# Altium PCB tomg.PcbDoc (part 1 of 2)
Units mm, origin at the board's own origin, x right, y up, seen from the top; angles counter-clockwise.
Board outline 105.3 x 86.65 mm, 2 copper layers (Top Layer, Bottom Layer); 102 components, 0 nets, 379 pads, 0 vias.
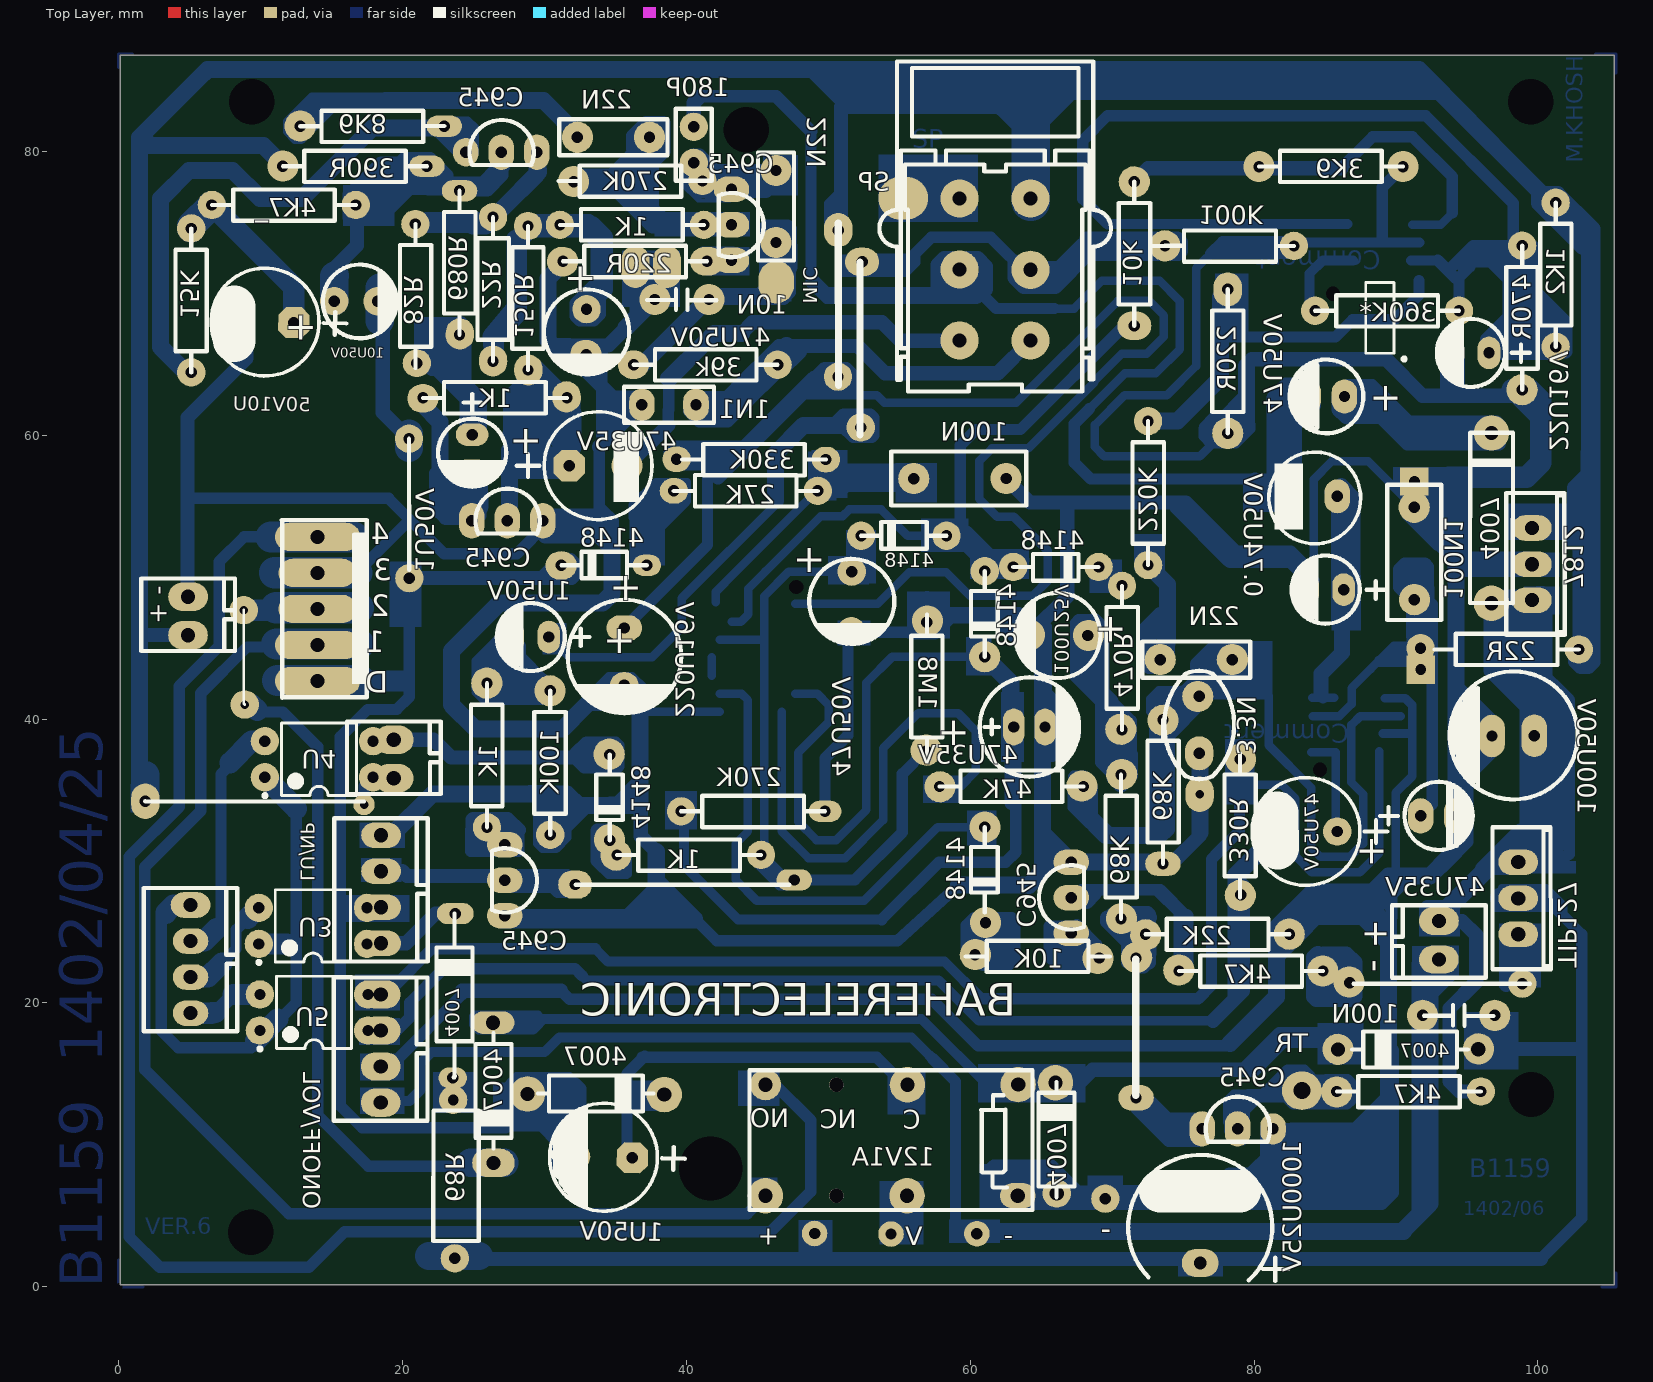
[diagram p0: Top Layer view]
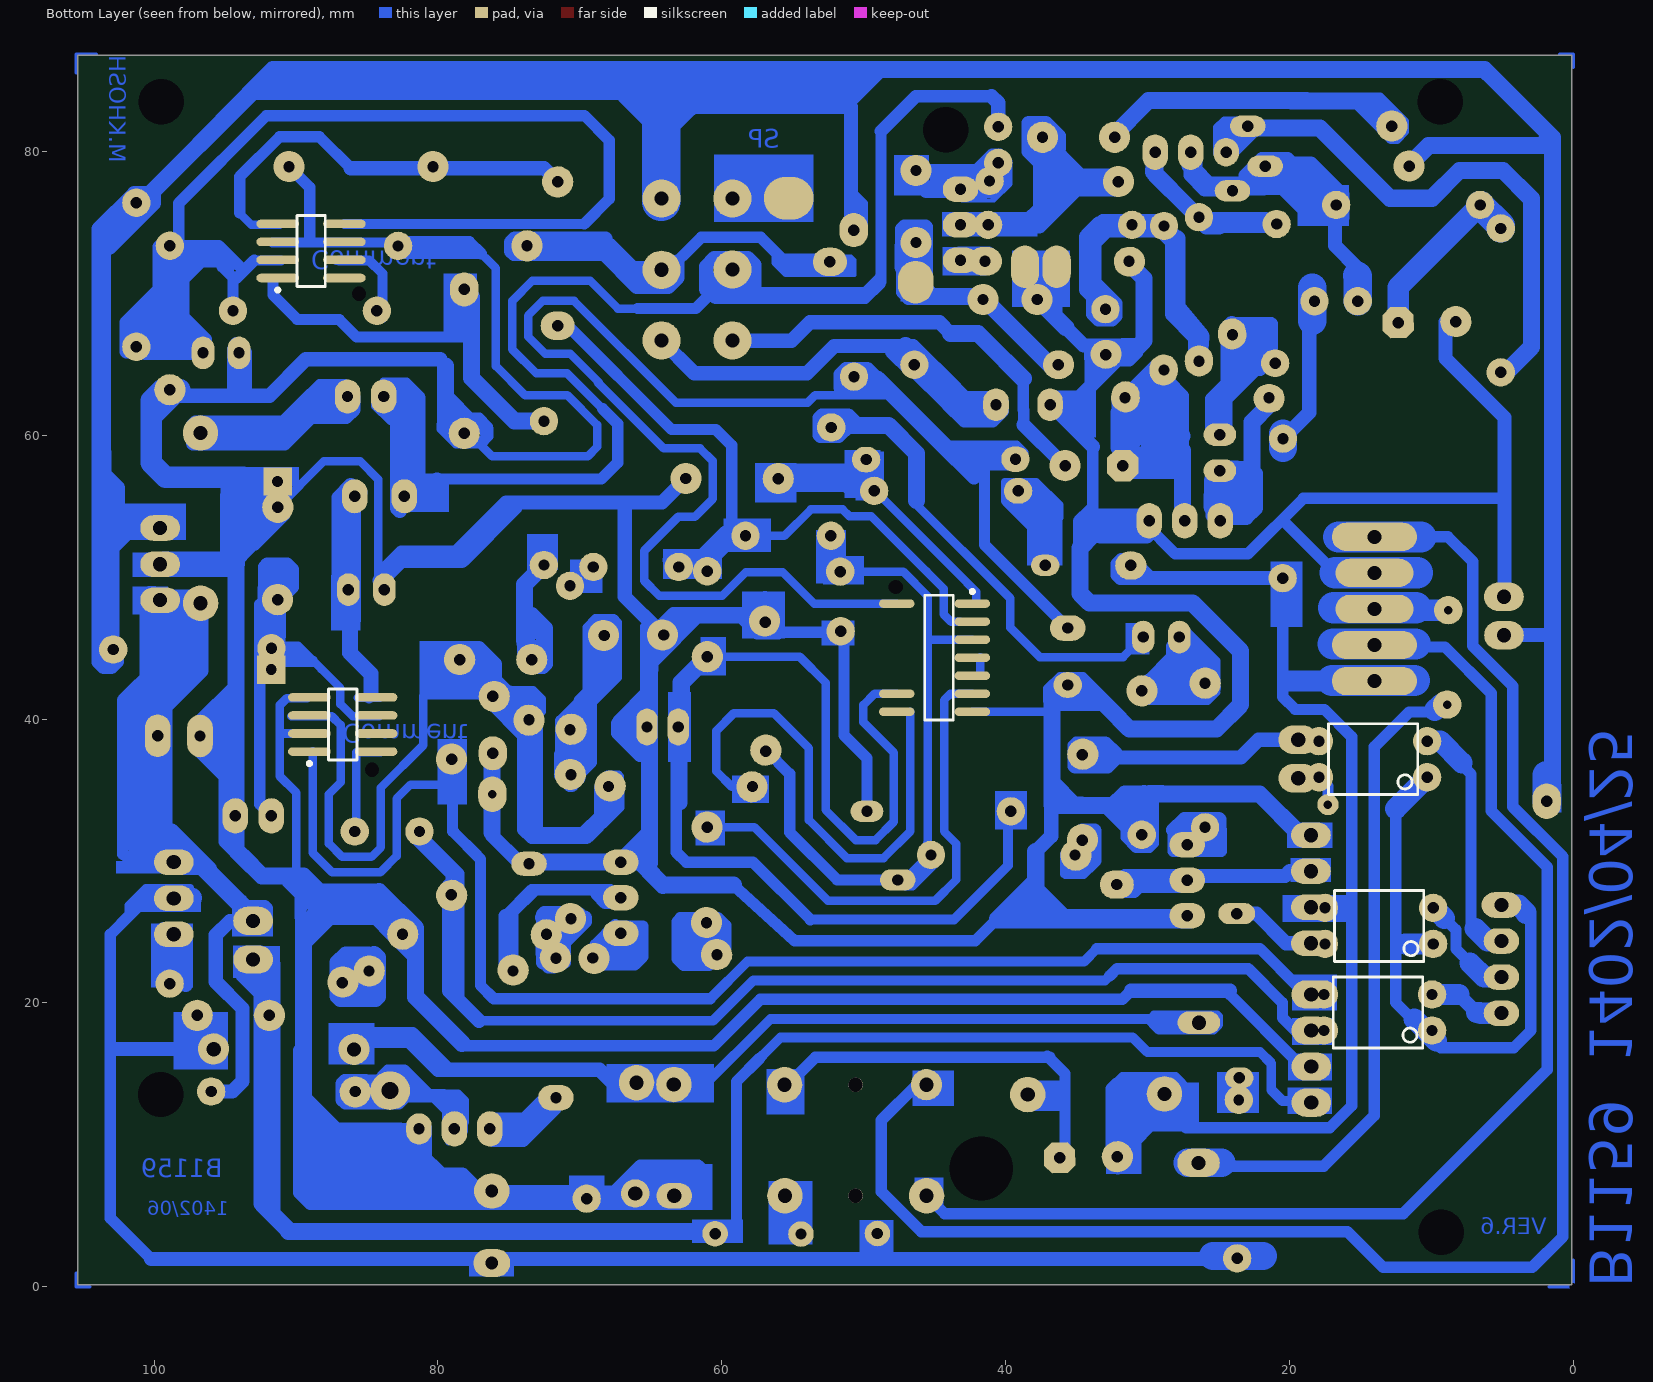
[diagram p1: Bottom Layer view, seen from below]

## Layer stack, top to bottom
Top Solder: solder mask 0.0102, Solder Resist, Dk 3.5
Top Layer: signal copper 0.0356
Dielectric1: dielectric 0.32, FR-4, Dk 4.8
Bottom Layer: signal copper 0.0356
Bottom Solder: solder mask 0.0102, Solder Resist, Dk 3.5

## Board outline
0.097,0.125 105.394,0.125 105.394,86.774 0.097,86.774

## Design rules (kind name [scope] priority, off if disabled: settings)
Clearance [All] p1: gap=0.3 ignorepadtopadclearanceinfootprint=FALSE except(0: Arc-Hole Track-Hole SMDPad-Hole THPad-Hole Via-Hole Fill-Hole Poly-Hole Region-Hole Text-Hole)
FabricationTestPointUsage TestPointUsage [All] p1: valid=0 allowmultiple=FALSE
FabricationTestpoint Testpoint [(IsPad And (OnTopLayer Or OnBottomLayer))] p1: side=3 testpointundercomponent=TRUE minsize=1.016 maxsize=2.54 preferedsize=1.524 minholesize=0 maxholesize=1.016 preferedholesize=0.813 testpointgrid=0.025 allowsidetop=TRUE allowsidebottom=TRUE usegrid=TRUE gridtolerance=0
PolygonConnect [All] p1: connectstyle=Relief reliefconductorwidth=0.254 reliefentries=4 polygonreliefangle="90 Angle" airgapwidth=0.254
RoutingVias [All] p1: holewidth=0.8 width=1.6 viastyle="Through Hole" minholewidth=0.711 minwidth=1.27 maxholewidth=0.711 maxwidth=1.27
SolderMaskExpansion [All] p1: expansion=0.102
Width [All] p1: maxlimit=0.3 minlimit=0.3 preferedwidth=0.3
28 further rules are at their usual default settings.

## Components (designator, comment, footprint, x,y, rotation, side; value= is the part's Value field where it differs from the comment)
0.74U50V "0.47uF" RB.1/.3#1 86.312,49.12 r0 top
1K "1K" AXIAL0.4#1 31.575,62.633 r180 top
1K "1K" AXIAL0.4#2 41.227,74.825 r180 top
1K "1K" AXIAL0.4#2 35.106,30.426 r0 top
1K "1K" AXIAL0.4#2 25.937,42.516 r270 top
1K2 "1K2" AXIAL0.4#2 101.248,66.24 r90 top
1M8 "1M8" AXIAL0.4#3 56.95,47.368 r270 top
1N1 "1nF" RAD0.15#1 38.764,62.151 r180 top
1U50V "1uF" RB.1/.3#1 24.895,60.042 r90 top
1U50V "1uF" RB.2/.3#1 34.15,9.125 r359 top
1U50V "1uF" RB.1/.3#1 30.294,45.781 r0 top
3.3N "3.3nF" RAD0.158POLYSTER 76.127,37.589 r90 top
3K9 "3K9" AXIAL0.4#2 90.49,78.933 r180 top
4K7 "4K7" AXIAL0.4#2 74.705,22.247 r0 top
4K7 "4K7" AXIAL0.4#2 85.831,13.754 r0 top
4K7_ "4K7" AXIAL0.4#2 6.556,76.229 r0 top
6K8 "6K8" AXIAL0.4#4 12.779,81.785 r0 top
10K "10K" AXIAL0.4#5 69.828,23.263 r180 top
10k "3K9" AXIAL0.4#6 71.555,67.713 r90 top
10N "1nF" RAD0.15#2 39.678,69.567 r180 top
10U50V "10uF" ELECTROLIT1 18.223,69.448 r180 top
12V1A "Comment" RELAY12V1A 54.386,10.36 r180 top
15K "15K" AXIAL0.4#2 5.1,74.575 r270 top
22K "330R" AXIAL0.4#2 72.342,24.838 r0 top
22N "3.3nF" RAD0.2II 75.924,44.193 r180 top
22N "100nF" RAD0.2II 34.852,80.997 r180 top
22N "100nF" RAD0.2II 46.307,76.121 r90 top
22R "22R" AXIAL0.4#2 26.368,65.224 r90 top
22R "22R" AXIAL0.4#7 102.873,44.904 r180 top
22U16V "22uF" RB.1/.3#1 96.549,65.808 r0 top
27K "27K" AXIAL0.4#8 49.254,56.08 r180 top
39k "220R" AXIAL0.4#2 36.274,64.97 r0 top
47K "47K" AXIAL0.4#9 67.974,35.252 r180 top
47U35V "47uF" RB.2/.3#1 33.768,57.858 r180 top
47U35V "Comment" RB.1/.3#2 91.733,33.176 r180 top
47U35V "47uF" "cap 02" 64.164,39.443 r180 top
47U50V "47uF" ELECTROLIT2#1 32.931,65.685 r90 top
47U50V "47uF" RB.2/.3#2 83.654,32.079 r0 top
47U50V "47uF" ELECTROLIT2#2 51.617,46.694 r90 top
47U50V "47uF" RB.1/.2 83.823,62.735 r0 top
50V10U "1uF" RB.2/.3#1 10.3,67.975 r359 top
68K "330R" AXIAL0.4#2 70.615,25.93 r90 top
68K "68K" AXIAL0.4#10 73.576,29.804 r90 top
68R "Comment" RES0.2W3 23.6,10.535 r90 top
82R "82R" AXIAL0.4#9 20.897,64.739 r90 top
100K "100K" AXIAL0.4#2 30.396,41.996 r270 top
100K "100K" AXIAL0.4#9 72.659,73.341 r0 top
100N "100nF" RAD0.3 59.428,56.957 r180 top
100N "10nF" RAD0.2II 94.415,19.123 r180 top
100N1 "100nF" RAD0.3 91.292,51.51 r90 top
100U25V "47uF" ELECTROLIT2#2 64.57,45.92 r0 top
100U50V "Comment" CAP100501 98.301,38.808 r180 top
150R "150R" AXIAL0.4#9 28.832,74.749 r270 top
180P "120pF" RAD0.1 40.516,80.464 r90 top
220K "220K" AXIAL0.4#7 72.526,50.855 r90 top
220R "220R" AXIAL0.4#11 31.296,72.26 r0 top
220R "220R" AXIAL0.4#12 78.14,60.137 r90 top
220U16V "220uF" ELECTROLIT3 35.614,42.402 r90 top
270K "270K" AXIAL0.4#9 30.977,77.917 r0 top
270K "270K" AXIAL0.4#13 39.619,33.499 r0 top
330K "330K" AXIAL0.4#14 39.678,58.29 r0 top
330R "330R" AXIAL0.4#15 78.997,27.429 r90 top
360K* "360K" AXIAL0.4#2 84.295,68.777 r0 top
390R "390R" AXIAL0.4#4 11.56,78.965 r0 top
470R "330R" AXIAL0.4#2 70.691,39.238 r90 top
470R "470R" AXIAL0.4#16 98.885,73.352 r270 top
680R "680R" AXIAL0.4#17 24.006,67.078 r90 top
1000U25V "Comment" RB.2/.4 76.2,1.67 r270 top
4007 "1N4007" 1N4007#1 23.65,25.684 r270 top
4007 "1N4007" 1N4007#2 85.906,16.71 r0 top
4007 "1N4007" 1N4007#3 66.07,15.44 r270 top
4007 "1N4007" 1N4007#4 26.396,8.722 r90 top
4007 "1N4007" 1N4007#3 38.687,13.611 r180 top
4007 "Comment" DIOD40071 96.726,53.794 r90 top
4148 "1N4148" 1N4148#1 52.302,52.915 r0 top
4148 "1N4148" 1N4148#2 69.04,50.721 r180 top
4148 "1N4148" 1N4148#3 31.183,50.835 r0 top
4148 "1N4148" 1N4148#4 61.014,44.396 r90 top
4148 "1N4148" 1N4148#1 34.598,31.467 r90 top
4148 "1N4148" 1N4148#2 61.014,26.362 r90 top
"- +" "" Connector2pin 4.877,47.351 r90 top
"- +" "" Connector2pin 93.018,24.33 r270 top
C945 "2SC945" 2SC945#1 81.334,11.122 r90 top
C945 "2SC945" 2SC945#2 29.874,53.972 r90 top
C945 "2SC945" 2SC945#3 29.453,79.949 r90 top
C945 "2SC945" 2SC945#2 43.169,72.329 r0 top
C945 "2SC945" 2SC945#2 27.195,26.146 r0 top
C945 "2SC945" 2SC945#2 67.11,29.918 r180 top
LU/NP "" Connector4pin#1 18.475,28.01 r90 top
ONOFF/VOL "" Connector4pin#2 18.45,16.785 r90 top
U3 "Comment" DIP-4#1 13.675,25.425 r0 top
U4 "Comment" DIP-4#2 14.1,37.175 r0 top
U5 "Comment" DIP-4#2 13.75,19.325 r0 top
? "Comment" CON5P 14.5,47.8 r270 top
? "" SWITCH3 59.24,66.684 r90 top
? "" Connector2pin 19.375,37.275 r90 top
? "7812" 7812 99.571,50.924 r90 top
? "TIP127" 7812 98.606,27.378 r90 top
? "" Connector4pin#3 5.05,23.09 r90 top
? "Comment" D008_L 86.704,39.619 r180 bottom
? "Comment" D008_L 88.935,72.988 r180 bottom
? "4069" D014_L 44.687,44.328 r0 bottom

## Footprints (in the part's own frame and the unit in brackets; to place one, negate y for a bottom-side part, rotate by r counter-clockwise, add the part's x,y. Pads: shape width x height; smd on the part's side, far side on the other; paste and mask are expansions set on the pad)
1N4007#1 [mm]
  silkscreen extent -0.61,-1.27 10.92,1.27
1N4007#2 [mm]
  round 2 hole 1: A(9.885,0.025) K(0,0)
  silkscreen extent 1.02,-1.27 9.14,1.27
1N4007#3 [mm]
  round 0 all layers, no hole: A(9.885,0.025) K(0,0)
  silkscreen extent 1.02,-1.27 9.14,1.27
1N4007#4 [mm]
  oval 1.6x3 hole 1: A(9.885,0.025)
  oval 2x3 hole 1: K(0,0)
  silkscreen extent 1.02,-1.27 9.14,1.27
1N4148#1 [mm]
  round 2 hole 0.8: A(6.02,0) K(0,0)
  silkscreen extent 0,-0.92 6.02,0.97
1N4148#2 [mm]
  round 2 hole 0.8: A(6.02,0)
  round 0 all layers, no hole: K(0,0)
  silkscreen extent 0,-0.91 6.02,0.97
1N4148#3 [mm]
  oval 2x1.5 hole 0.8: A(6.02,0)
  round 2 hole 0.8: K(0,0)
  silkscreen extent 0,-0.91 6.02,0.97
1N4148#4 [mm]
  round 2 hole 0.8: A(6.02,0)
  round 2.2 hole 0.8: K(0,0)
  silkscreen extent 0,-0.92 6.02,0.97
2SC945#1 [mm]
  oval 2.5x1.8 hole 0.8: B(0,5) C(0,2.5)
  oval 2.2x1.8 hole 0.8: E(0,0)
  silkscreen extent -0.91,0.22 2.27,4.75
2SC945#2 [mm]
  oval 2.5x1.8 hole 0.8: B(0,5) C(0,2.5) E(0,0)
  silkscreen extent -0.91,0.22 2.27,4.75
2SC945#3 [mm]
  oval 2x1.8 hole 0.8: B(0,5)
  oval 2.5x1.8 hole 0.8: C(0,2.5) E(0,0)
  silkscreen extent -0.91,0.22 2.27,4.75
7812 [mm]
  oval 1.8x2.8 hole 1: "+12V OUT"(2.54,0) GND(-0.012,0) "TO 35V IN PUT"(-2.54,0)
  silkscreen extent -5,-2.31 5,1.8
AXIAL0.4#1 [mm]
  round 2 hole 0.8: 1(0,0)
  oval 2x1.95 hole 0.8: 2(10.145,0.001)
  silkscreen extent 0,-1.12 10.15,1.09
AXIAL0.4#2 [mm]
  round 2 hole 0.8: 1(0,0) 2(10.145,0.001)
  silkscreen extent 0,-1.12 10.14,1.09
AXIAL0.4#3 [mm]
  round 2 hole 0.8: 1(0.546,-0.011)
  round 0 all layers, no hole: 2(10.145,0.001)
  silkscreen extent 0,-1.12 10.15,1.09
AXIAL0.4#4 [mm]
  round 2.2 hole 0.8: 1(0,0)
  oval 2.5x1.5 hole 0.8: 2(10.145,0.001)
  silkscreen extent 0,-1.12 10.15,1.09
AXIAL0.4#5 [mm]
  round 0 all layers, no hole: 1(0,0) 2(10.145,0.001)
  silkscreen extent 0,-1.12 10.14,1.09
AXIAL0.4#6 [mm]
  oval 2x2.4 hole 0.8: 1(0,0)
  round 2 hole 0.8: 2(10.145,0.001)
  silkscreen extent 0,-1.12 10.15,1.09
AXIAL0.4#7 [mm]
  round 2 hole 0.8: 1(0,0)
  round 0 all layers, no hole: 2(10.145,0.001)
  silkscreen extent 0,-1.12 10.14,1.09
AXIAL0.4#8 [mm]
  round 2 hole 0.8: 1(0,0)
  oval 2x1.8 hole 0.8: 2(10.145,0.001)
  silkscreen extent 0,-1.12 10.15,1.09
AXIAL0.4#9 [mm]
  round 0 all layers, no hole: 1(0,0)
  round 2 hole 0.8: 2(10.145,0.001)
  silkscreen extent 0,-1.12 10.15,1.09
AXIAL0.4#10 [mm]
  oval 1.7x2.5 hole 0.8: 1(0,0)
  round 0 all layers, no hole: 2(10.145,0.001)
  silkscreen extent 0,-1.12 10.14,1.09
AXIAL0.4#11 [mm]
  round 2 hole 0.8: 1(0,0)
  oval 2.4x2 hole 0.8: 2(10.145,0.001)
  silkscreen extent 0,-1.12 10.14,1.09
AXIAL0.4#12 [mm]
  round 2.2 hole 0.8: 1(0,0)
  oval 2.4x2 hole 0.8: 2(10.145,0.001)
  silkscreen extent 0,-1.12 10.14,1.09
AXIAL0.4#13 [mm]
  round 2 hole 0.8: 1(0,0)
  oval 2.3x1.5 hole 0.8: 2(10.145,0.001)
  silkscreen extent 0,-1.12 10.14,1.09
AXIAL0.4#14 [mm]
  round 0 all layers, no hole: 1(0,0)
  oval 2x1.8 hole 0.8: 2(10.145,0.001)
  silkscreen extent 0,-1.12 10.14,1.09
AXIAL0.4#15 [mm]
  round 0 all layers, no hole: 1(0,0)
  round 2 hole 0.8: 2(9.728,-0.025)
  silkscreen extent 0,-1.12 10.14,1.09
AXIAL0.4#16 [mm]
  round 2 hole 0.8: 1(0,0)
  round 2.2 hole 0.8: 2(10.145,0.001)
  silkscreen extent 0,-1.12 10.14,1.09
AXIAL0.4#17 [mm]
  round 2 hole 0.8: 1(0,0)
  oval 1.5x2.5 hole 0.8: 2(10.145,0.001)
  silkscreen extent 0,-1.12 10.14,1.09
CAP100501 [mm]
  oval 1.8x3 hole 0.8: 1(-1.44,-0.01) 2(1.54,0)
  silkscreen extent -4.5,-4.55 4.52,4.47
"cap 02" [mm]
  oval 1.5x2.6 hole 0.8: 1(1.1,0) 2(-1.1,0)
  silkscreen extent -3.5,-3.5 3.5,3.5
CON5P [mm]
  round 0 on Top Overlay: 1(-18.569,72.015) 2(-19.839,72.015) 3(-21.109,72.015) 5(-22.379,76.715) 6(-21.109,76.715) 7(-19.839,76.715)
  oval 2x6 hole 1: 1(-5.04,-0.497) 4(2.58,-0.497) 5(5.12,-0.497)
  oval 2x5.5 hole 1: 2(-2.5,-0.497) 3(0.04,-0.497)
  oval 0x1.9 on Top Overlay: 4(-22.379,72.015) 8(-18.569,76.715)
  silkscreen extent -22.97,-3.02 6.3,76.19
Connector2pin [mm]
  oval 2x2.8 hole 1: 1(-1.448,0.006) 2(1.27,0)
  silkscreen extent -2.55,-3.3 2.55,3.3
Connector4pin#1 [mm]
  oval 1.8x2.8 hole 1: 1(-3.81,0) 2(-1.27,0) 3(1.27,0) 4(3.81,0)
  silkscreen extent -5.09,-3.3 5,3.3
Connector4pin#2 [mm]
  oval 2x2.8 hole 1: 1(-3.81,0) 2(-1.27,0) 3(1.27,0) 4(3.81,0)
  silkscreen extent -5.09,-3.3 5,3.3
Connector4pin#3 [mm]
  oval 1.8x2.5 hole 1: 1(-3.81,0) 2(-1.27,0) 3(1.27,0)
  oval 1.8x2.8 hole 1: 4(3.81,0)
  silkscreen extent -5.09,-3.3 5,3.3
D008_L [mm] "SOIC, 8-Leads, Body 4.9x3.9mm, Pitch 1.27mm, IPC High Density"
  oval 3x0.6 smd: 1(-2.35,-1.905) 2(-2.35,-0.635) 3(-2.35,0.635) 4(-2.35,1.905) 5(2.35,1.905) 6(2.35,0.635) 7(2.35,-0.635) 8(2.35,-1.905)
  silkscreen extent -2.48,-2.88 1,2.5, body extent -2,-2.5 2,2.5, height 1.75
D014_L [mm] "SOIC, 14-Leads, Body 8.7x3.9mm, Pitch 1.27mm, IPC High Density"
  oval 2.5x0.6 smd: 1(-2.35,-3.81) 2(-2.35,-2.54) 3(-2.35,-1.27) 4(-2.35,0) 5(-2.35,1.27) 6(-2.35,2.54) 7(-2.35,3.81) 8(2.975,3.81) 9(2.975,2.54) 14(2.975,-3.81)
  silkscreen extent -2.47,-4.78 1,4.4, body extent -2,-4.38 2,4.38, height 1.75
DIOD40071 [mm]
  round 2.5 hole 1: 1(-5.63,0.01) 2(6.37,0)
  silkscreen extent -5.63,-1.51 6.39,1.51
DIP-4#1 [mm] "DIP; 4 Leads; Row Spacing 7.62 mm; Pitch 2.54 mm"
  round 2 hole 0.8: 1(-3.81,-1.27) 2(-3.81,1.27)
  oval 1.8x2 hole 0.8: 3(3.81,1.27) 4(3.81,-1.27)
  silkscreen extent -3.93,-2.69 2.65,2.55, body extent -3.15,-2.5 3.15,2.5, height 5.6
DIP-4#2 [mm] "DIP; 4 Leads; Row Spacing 7.62 mm; Pitch 2.54 mm"
  round 2 hole 0.8: 1(-3.81,-1.27) 2(-3.81,1.27) 3(3.81,1.27) 4(3.81,-1.27)
  silkscreen extent -3.93,-2.69 2.65,2.55, body extent -3.15,-2.5 3.15,2.5, height 5.6
ELECTROLIT1 [mm]
  round 2 hole 0.8: 1(0,0) 2(3.048,-0.002)
  silkscreen extent -1.35,-2.58 3.85,2.62
ELECTROLIT2#1 [mm]
  round 2 hole 0.8: 1(0,0) 2(3.2,-0.025)
  silkscreen extent -1.4,-3.03 4.6,2.97
ELECTROLIT2#2 [mm]
  round 2 hole 0.8: 1(-0.5,0) 2(3.7,-0.025)
  silkscreen extent -1.4,-3.03 4.6,2.97
ELECTROLIT3 [mm]
  oval 1.8x2 hole 0.8: 1(0,0)
  oval 1.8x2.5 hole 0.8: 2(4.013,0)
  silkscreen extent -1.99,-4.02 6.01,3.98
RAD0.1 [mm]
  round 2 hole 0.8: 1(-1.27,0) 2(1.27,0)
  silkscreen extent -2.54,-1.27 2.54,1.27
RAD0.2II [mm]
  round 2.2 hole 0.8: 1(-2.54,0) 2(2.54,0)
  silkscreen extent -3.81,-1.27 3.81,1.27
RAD0.3 [mm]
  round 2.2 hole 0.8: 1(-3.096,0) 2(3.415,0.012)
  silkscreen extent -4.52,-1.91 5,1.91
RAD0.15#1 [mm]
  oval 1.8x2.3 hole 0.8: 1(-1.905,0) 2(1.905,0)
  silkscreen extent -3.17,-1.27 3.17,1.27
RAD0.15#2 [mm]
  round 2.2 hole 0.8: 1(-1.905,0) 2(1.905,0)
RAD0.158POLYSTER [mm]
  oval 2.4x2 hole 0.8: 1(0,0)
  round 2 hole 0.8: 2(4.013,0)
  silkscreen extent -1.82,-2.46 5.82,2.46
RB.1/.2 [mm]
  round 1.8 hole 0.8: 1(0,0) 2(2.54,0)
  silkscreen extent -1.33,-2.6 3.87,2.6
RB.1/.3#1 [mm]
  oval 1.6x2.3 hole 0.8: 1(0,0) 2(-2.54,0)
  silkscreen extent -3.67,-2.4 2.87,2.4
RB.1/.3#2 [mm]
  oval 1.8x2.5 hole 0.8: 1(0,0) 2(-2.54,0)
  silkscreen extent -3.67,-2.4 2.87,2.4
RB.2/.3#1 [mm]
  oct 2.2x2.2 hole 0.8: 1(2.032,0)
  round 2.2 hole 0.8: 2(-2.032,0)
  silkscreen extent -3.8,-3.8 5.73,3.8
RB.2/.3#2 [mm]
  oct 0x0 all layers, no hole: 1(2.032,0)
  round 0 all layers, no hole: 2(-2.032,0)
  silkscreen extent -3.8,-3.8 5.73,3.8
RB.2/.4 [mm]
  oval 2x2.6 hole 0.9: 1(0,0)
  round 2.5 hole 0.9: 2(-5.08,0)
  silkscreen extent -7.62,-5.08 1.22,5.08
RELAY12V1A [mm]
  round 2.5 hole 1: 1(-8.985,-3.885) 3(-1.18,-3.868) 4(-1.155,3.952) 8(8.825,3.952)
  oval 2.5x1.8 hole 1: 2(-8.96,3.952)
  round 1.01 hole 1: 5(3.825,-3.868) 6(3.825,3.952)
  round 2.2 hole 1: 7(8.815,-3.875)
  silkscreen extent -9.99,-4.89 9.95,4.96
RES0.2W3 [mm]
  round 0 all layers, no hole: 1(-7.31,-0.25) 2(12.74,-0.15)
  silkscreen extent -7.31,-1.76 1.89,1.44
SWITCH3 [mm]
  round 2.7 hole 1: Common1(10,-5) Common2(10,0) "Normally Close1"(0,-5) "Normally Close2"(0,0) "Normally Open1"(4.975,-5) "Normally Open2"(5,0)
  silkscreen extent -3.6,-10.67 19.65,5.65

## Part data
12V1A: library part RELAY12V1A
47U35V: library part CAP22251
68R: library part RES0.2W3
100U50V: library part CAP100501
1000U25V: library part CAP1000251
4007: library part DIOD40071
?: library part CON5P

## Free pads (board coordinates)
  round 2 hole 0.8: 0(20.468,49.933) 0(23.675,2) 0(61.065,25.651) 0(69.091,23.162) 0(73.575,39.949) 0(81.297,32.079) 1(20.446,59.76) 1(85.861,32.079) 2(67.974,35.252) 4(52.276,60.55) 6(50.676,64.132) 11(28.832,74.749) 13(73.714,73.352) 18(71.678,23.14) 19(60.328,23.39) 22(91.727,44.992) 26(72.525,61) 28(69.04,50.721) 30(56.899,37.741) 32(79.048,27.632) 36(98.9,21.358) 37(86.726,21.416) 102(69.515,6.205)
  round 0 hole 3: 0(45,-1.5) 3(-1.5,45)
  round 0 hole 3.2: 0(99.499,83.497) 1(9.371,83.497) 2(44.199,81.531) 20(99.532,13.545) 21(9.3,3.825)
  oval 2x1.5 hole 0.8: 1(23.528,14.715)
  oval 2.6x1.5 hole 0.8: 1(23.702,26.294)
  round 0 all layers, no hole: 1(31.395,41.137) 5(45.703,78.335)
  oval 1.8x2.4 all layers, no hole rot 179.8: 1(83.823,62.735) 2(86.363,62.735) 4(83.823,62.735)
  oval 2x3 all layers, no hole: 2(36.398,71.877) 2(38.628,71.877)
  round 3.201 hole 4.5: 2(41.712,8.342)
  oval 2.5x3 all layers, no hole: 2(46.327,70.79)
  oval 1.8x2.4 hole 0.8 rot 179.8: 3(85.863,55.699) 4(82.363,55.699)
  oval 2x1.95 hole 0.8: 4(20.999,65.076)
  oval 3.5x3 all layers, no hole: 4(55.274,76.705)
  oval 2.4x2 hole 0.8: 5(52.378,72.217) 25(32.156,28.339)
  round 2.5 hole 1: 6(38.433,13.535) 10(28.802,13.586) 12(65.996,14.376)
  oval 2x2.4 hole 0.8: 8(50.693,74.457)
  round 0 hole 0.5: 9(0,0)
  round 2.2 hole 0.8: 9(32.043,77.873)
  oval 2x1.8 hole 0.8: 15(39.297,58.315)
  round 2 hole 1: 15(66.095,6.571)
  oval 2.5x1.8 hole 0.8: 17(71.678,13.322)
  oval 2x2.5 hole 0.8: 21(1.866,34.209)
  oval 2.5x1.5 hole 0.8: 24(47.59,28.663)
  oval 2.8x2.7 hole 1.2: 34(83.366,13.814)
  round 2.2 all layers, no hole: 38(90.49,78.933) 39(71.554,77.858) 40(80.345,78.932) 41(73.714,73.352) 55(76.028,41.593) 56(64.173,45.93) 57(68.326,45.896) 60(56.973,46.917) 61(67.857,35.281) 62(70.67,36.101) 63(70.603,39.282) 64(73.583,39.919) 65(79.033,37.181) 66(61.025,32.384) 67(57.861,35.23) 68(56.89,37.809) 70(34.553,37.524) 71(95.819,16.762) 72(85.907,16.728) 73(85.823,13.714) 74(86.694,21.467) 75(84.835,22.254) 76(82.474,24.841) 77(35.039,30.408) 78(34.583,31.501) 79(74.691,22.314) 80(79.024,27.579) 81(61.072,25.663) 82(72.361,24.8) 83(71.722,23.194) 84(70.652,25.939) 85(30.38,41.992) 86(25.927,42.527) 88(68.99,23.136) 89(60.354,23.403)
  oval 2.2x2.1 all layers, no hole rot 179.8: 42(31.271,72.234)
  oval 2x2.2 all layers, no hole rot 179.8: 44(28.86,64.599) 45(26.365,65.235) 46(24.038,67.144) 49(31.539,62.707)
  oval 2x2.2 all layers, no hole rot 89.8: 48(21.426,62.59) 51(36.261,64.967) 52(32.912,65.721) 53(31.171,50.819)
  round 1.8 hole 0.8: 90(54.413,3.712) 91(49.025,3.75) 92(60.465,3.736)
  round 2 hole 0.762: 93(23.557,13.158)
  round 0 hole 1: 94(47.735,49.318) 95(84.65,36.429) 95(85.561,69.978)
  oval 2x2.5 hole 0.6: 101(76.158,34.7)
  round 1.5 hole 0.6: 103(17.275,33.975)
  rect 2x2 hole 0.762: 105(91.736,43.488) 106(91.294,56.744)
  round 2 hole 0.6: 107(8.875,41.025) 108(8.8,47.675)

## Nets (pads, with @x,y where several pads share a name; then routed paths per layer and width w, separated by ;. In a path a pad name is that pad's centre, name@x,y a point inside that pad or via, vN(x,y) a via of type N, cw(c..) or ccw(c..) an arc to the next point about the centre after c; other vN are vias at no path point)
pads on no net: 0.74U50V.1 0.74U50V.2 1K2.1 1K2.2 1K.1 1K.2 1M8.1 1M8.2 1N1.1 1N1.2 1U50V.1 1U50V.2 3.3N.1 3.3N.2 3K9.1 3K9.2 4K7.1 4K7.2 4K7_.1 4K7_.2 6K8.1 6K8.2 10K.1 10k.1 10k.2 10K.2 10N.1 10N.2 10U50V.1 10U50V.2 12V1A.1 12V1A.2 12V1A.3 12V1A.4 12V1A.5 12V1A.6 12V1A.7 12V1A.8 15K.1 15K.2 22K.1 22K.2 22N.1 22N.2 22R.1 22R.2 22U16V.1 22U16V.2 27K.1 27K.2 39k.1 39k.2 47K.1 47K.2 47U35V.1 47U35V.2 47U50V.1 47U50V.2 50V10U.1 50V10U.2 68K.1 68K.2 68R.1 68R.2 82R.1 82R.2 100K.1 100K.2 100N1.1 100N1.2 100N.1 100N.2 100U25V.1 100U25V.2 100U50V.1 100U50V.2 150R.1 150R.2 180P.1 180P.2 220K.1 220K.2 220R.1 220R.2 220U16V.1 220U16V.2 270K.1 270K.2 330K.1 330K.2 330R.1 330R.2 360K*.1 360K*.2 390R.1 390R.2 470R.1 470R.2 680R.1 680R.2 1000U25V.1 1000U25V.2 4007.1 4007.2 4007.A 4007.K 4148.A 4148.K "- +.1" "- +.2" "?.+12V OUT" "?.Normally Close1" "?.Normally Close2" "?.Normally Open1" "?.Normally Open2" "?.TO 35V IN PUT" ?.1 ?.2 ?.3 ?.4 ?.5 ?.6 ?.7 ?.8 ?.9 ?.14 ?.Common1 ?.Common2 ?.GND C945.B C945.C C945.E LU/NP.1 LU/NP.2 LU/NP.3 LU/NP.4 ONOFF/VOL.1 ONOFF/VOL.2 ONOFF/VOL.3 ONOFF/VOL.4 U3.1 U3.2 U3.3 U3.4 U4.1 U4.2 U4.3 U4.4 U5.1 U5.2 U5.3 U5.4